# EAGLE board dc_amp_1volt (EAGLE 9.5.0)
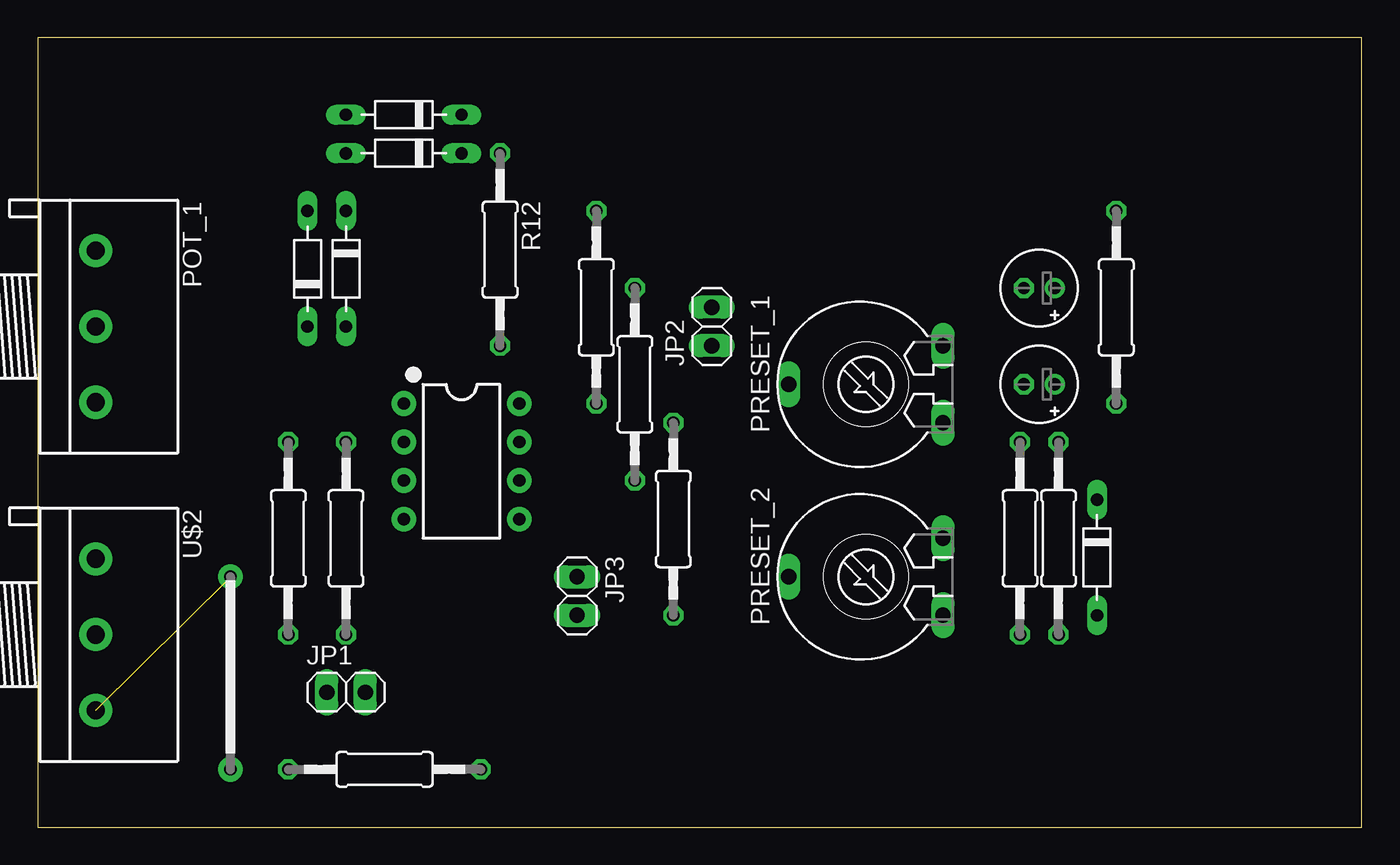
[diagram p0: board, top side]
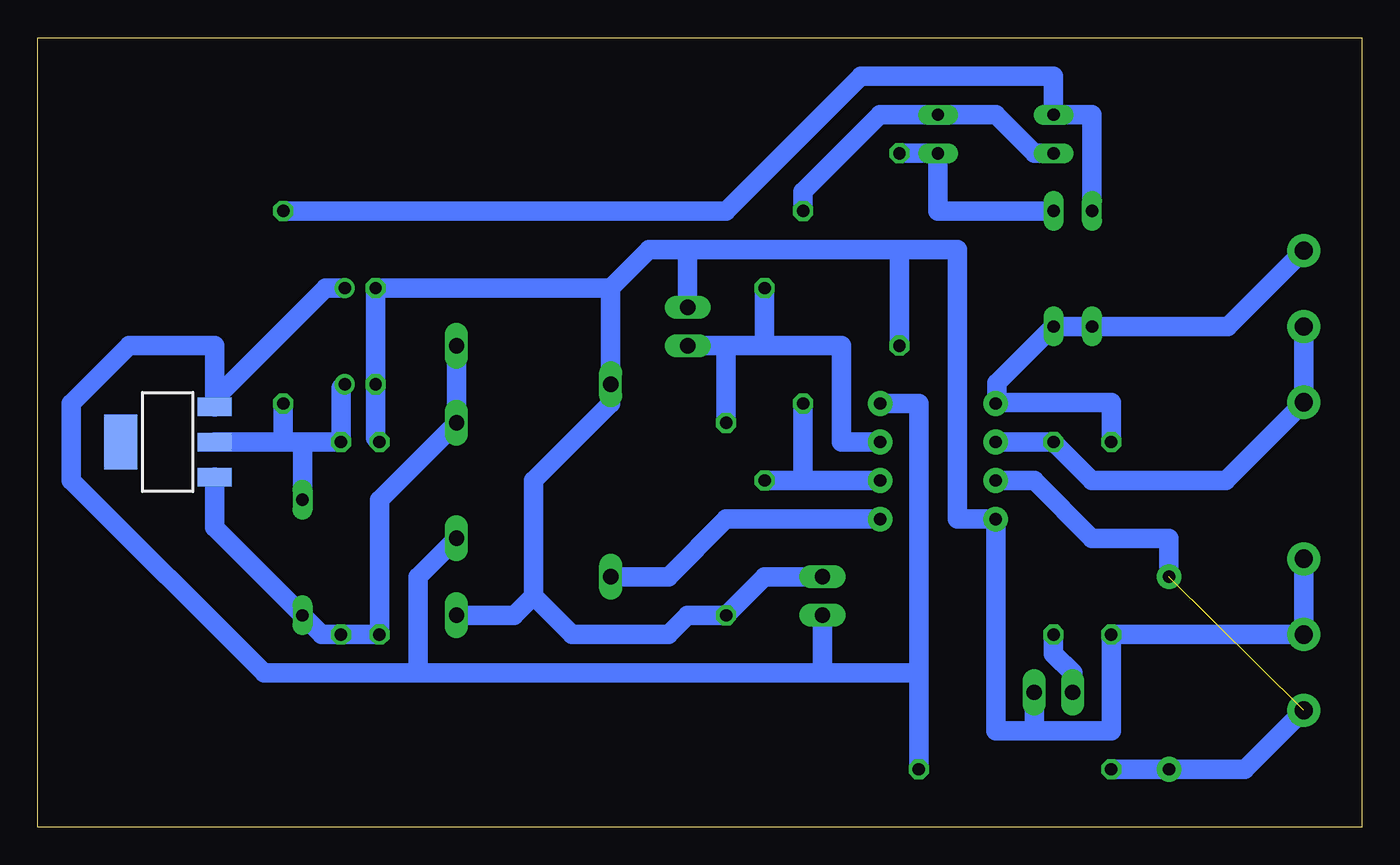
[diagram p1: board, bottom side, seen from below]

Size 87.3 x 52.06 mm. Coordinates in mm from the lower left corner, seen from the top.
Outline: 0,0 87.3,0 87.3,52.06 0,52.06 0,0
Copper layers (1*16): Top 0.035mm / dielectric 1.5mm / Bottom 0.035mm
Design rules "default": minimum track width 6mil, minimum drill 0.35mm, track to track 6mil, track to pad 6mil, pad to pad 6mil, via to via 6mil, smd to smd 6mil, copper to edge 40mil, drill to drill 6mil, minimum pad ring 10mil, minimum via ring 8mil, stop-mask expansion 4mil, vias tented up to drill 0mil, thermal gap 10mil

## Footprints (pad centres in the part's own frame; a part is rotated, then mirrored left to right if it is on the bottom)
E2-5 = drill 0.813 pad 1.27: + -1.016,0 | drill 0.813 pad 1.27 octagon: - 1.016,0
1X02 = drill 1.016 long: 1 -1.27,0; 2 1.27,0
3RP/1610N = drill 1.2 pad 2.184: 1 -5,0; 2 0,0; 3 5,0
PT-10 = drill 1.016 long: A -2.54,-5.08; E 2.54,-5.08; S 0,5.08
0207/12 = drill 0.813 octagon: 1 -6.35,0; 2 6.35,0
DIP08 = drill 0.813 pad 1.626: 1 -3.81,-3.81; 2 -1.27,-3.81; 3 1.27,-3.81; 4 3.81,-3.81; 5 3.81,3.81; 6 1.27,3.81; 7 -1.27,3.81; 8 -3.81,3.81
BRIDGE = drill 0.813 pad 1.626: 1 -6.35,0; 2 6.35,0
SOT223 = smd 1.219 x 2.235: 1 -2.311,-3.099; 2 0,-3.099; 3 2.311,-3.099 | smd 3.6 x 2.2: 4 0,3.099
D-7.5 = drill 0.813 long: A 3.81,0; C -3.81,0

## Placement (x,y rotation side)
C1  10u  [E2-5]  66.04,35.56 180 top
C2  22u  [E2-5]  66.04,29.21 180 top
JP1  [1X02]  20.32,8.89 0 top
JP2  [1X02]  44.45,33.02 90 top
JP3  [1X02]  35.56,15.24 270 top
POT_1  POT_1  [3RP/1610N]  3.81,33.02 270 top
PRESET_1  PRESET-10MM  [PT-10]  54.61,29.21 90 top
PRESET_2  PRESET-10MM  [PT-10]  54.61,16.51 90 top
R1  10k  [0207/12]  20.32,19.05 90 top
R2  100k  [0207/12]  41.91,20.32 90 top
R3  100k  [0207/12]  16.51,19.05 90 top
R4  220  [0207/12]  67.31,19.05 90 top
R5  20k  [0207/12]  22.86,3.81 180 top
R6  10k  [0207/12]  36.83,34.29 270 top
R7  10k  [0207/12]  39.37,29.21 90 top
R10  330  [0207/12]  64.77,19.05 270 top
R11  5k  [0207/12]  71.12,34.29 270 top
R12  5k  [0207/12]  30.48,38.1 270 top
U1  LM358  [DIP08]  27.94,24.13 270 top
U$1  BRIDGE  [BRIDGE]  12.7,10.16 270 top
U$2  POT_2  [3RP/1610N]  3.81,12.7 270 top
U$3  NCP1117  [SOT223]  78.74,25.4 90 bottom
U$4  1N4148  [D-7.5]  69.85,17.78 270 top
U$6  1N4148  [D-7.5]  17.78,36.83 90 top
U$7  1N4148  [D-7.5]  24.13,46.99 180 top
U$8  1N4148  [D-7.5]  20.32,36.83 270 top
U$9  1N4148  [D-7.5]  24.13,44.45 180 top

## Library data of the parts
C1 C2 R1-R4 R6 R7 R10-R12 U$4 U$6-U$9 = adq_proc_components
JP1-JP3 = pinhead
POT_1 PRESET_1 PRESET_2 U$2 = adq_proc; SPICEPREFIX: X
R5 = adq_proc_components; SPICEPREFIX: R
U1 = adq_proc_components; PROD_ID: IC-09172; SPICEMODEL: LM358_DUAL; SPICEPREFIX: X
U$1 = adq_proc
U$3 = adq_proc_components; SPICEMODEL: NCP1117; SPICEPREFIX: X

## Nets
0: C1.- C2.- JP1.2 JP2.2 JP3.1 PRESET_1.S PRESET_2.A R2.1 R3.1 R10.1 R12.2 U1.4 U$2.1 U$2.2
DC5_L: C1.+ JP3.2 PRESET_2.E R5.1 U1.8 U$3.3
DC_ADJ_L: C2.+ R4.2 R11.2 U$3.2 U$4.C
IN_L: JP1.1 R1.1
N$1: R5.2 U1.3 U$1.1 U$1.2 U$2.3
N$2: PRESET_2.S U1.5
N$3: POT_1.2 POT_1.3 R1.2 U1.2
N$4: R12.1 U$8.C U$9.C
N$5: R6.2 R7.1 U1.6
N$7: R11.1 U$6.A U$7.A
N$8: PRESET_1.A PRESET_1.E R4.1 R10.2 U$3.1 U$4.A
N$11: R6.1 U$7.C U$9.A
OUT: JP2.1 R2.2 R7.2 U1.7
VOUT_1: POT_1.1 R3.2 U1.1 U$6.C U$8.A

## Tracks (layer width: path | path; a pad name or v marks a point on that pad's centre or on a via)
0
  Bottom 1.27: 49.53,35.56 C1.- C2.- 65.02,25.65 R10.1 | 30.48,38.1 26.67,38.1 26.67,20.32 U1.4 24.13,6.35 21.59,6.35 | 21.59,6.35 16.51,6.35 R3.1 U$2.2 U$2.1 | PRESET_2.A 55.88,13.97 54.61,15.24 | 54.61,15.24 54.61,22.86 49.53,27.94 PRESET_1.S 49.53,35.56 | R12.2 30.48,38.1 | 54.61,15.24 52.07,12.7 45.72,12.7 44.45,13.97 R2.1 39.37,16.51 JP3.1 | 49.53,35.56 46.99,38.1 44.45,38.1 | 30.48,38.1 44.45,38.1 | JP1.2 21.59,6.35 | JP2.2 44.45,38.1
DC5_L
  Bottom 1.27: C1.+ 68.33,35.56 75.64,28.25 U$3.3 75.64,31.75 81.28,31.75 85.09,27.94 85.09,22.86 72.39,10.16 62.23,10.16 | 29.21,10.16 35.56,10.16 | 35.56,10.16 62.23,10.16 | U1.8 29.21,27.94 29.21,10.16 | R5.1 29.21,10.16 | PRESET_2.E 62.23,16.51 62.23,10.16 | JP3.2 35.56,10.16
DC_ADJ_L
  Bottom 1.27: 69.85,25.4 R4.2 67.31,28.96 C2.+ | U$4.C 69.85,25.4 | 69.85,25.4 71.12,25.4 | 71.12,25.4 U$3.2 | R11.2 71.12,25.4
IN_L
  Bottom 1.27: R1.1 20.32,11.43 19.05,10.16 JP1.1
N$1  (1 unrouted)
  Bottom 1.27: U1.3 21.59,22.86 17.78,19.05 12.7,19.05 U$1.1 | R5.2 U$1.2 7.7,3.81 U$2.3
N$2
  Bottom 1.27: U1.5 41.91,20.32 45.72,16.51 PRESET_2.S
N$3
  Bottom 1.27: U1.2 R1.2 17.78,22.86 8.97,22.86 POT_1.3 POT_1.2
N$4
  Bottom 1.27: U$8.C 27.94,40.64 U$9.C R12.1
N$5
  Bottom 1.27: U1.6 36.83,22.86 | 36.83,22.86 R7.1 | R6.2 36.83,22.86
N$7
  Bottom 1.27: U$6.A 17.78,46.99 U$7.A 20.32,49.53 33.02,49.53 41.91,40.64 R11.1
N$8
  Bottom 1.27: U$3.1 75.64,19.76 U$4.A 68.58,12.7 R4.1 R10.2 64.77,21.59 PRESET_1.A PRESET_1.E
N$11
  Bottom 1.27: U$9.A 21.59,44.45 24.13,46.99 U$7.C 31.75,46.99 36.83,41.91 R6.1
OUT
  Bottom 1.27: 41.91,31.75 39.37,31.75 | 39.37,31.75 34.29,31.75 34.29,25.4 U1.7 | R7.2 39.37,31.75 | R2.2 41.91,31.75 | JP2.1 41.91,31.75
VOUT_1
  Bottom 1.27: 24.05,28.02 16.51,28.02 R3.2 | 24.05,28.02 U1.1 | 24.05,28.02 24.05,29.29 U$8.A U$6.C 8.81,33.02 POT_1.1